# EAGLE board PCB v21_N v3 (EAGLE 9.7.0)
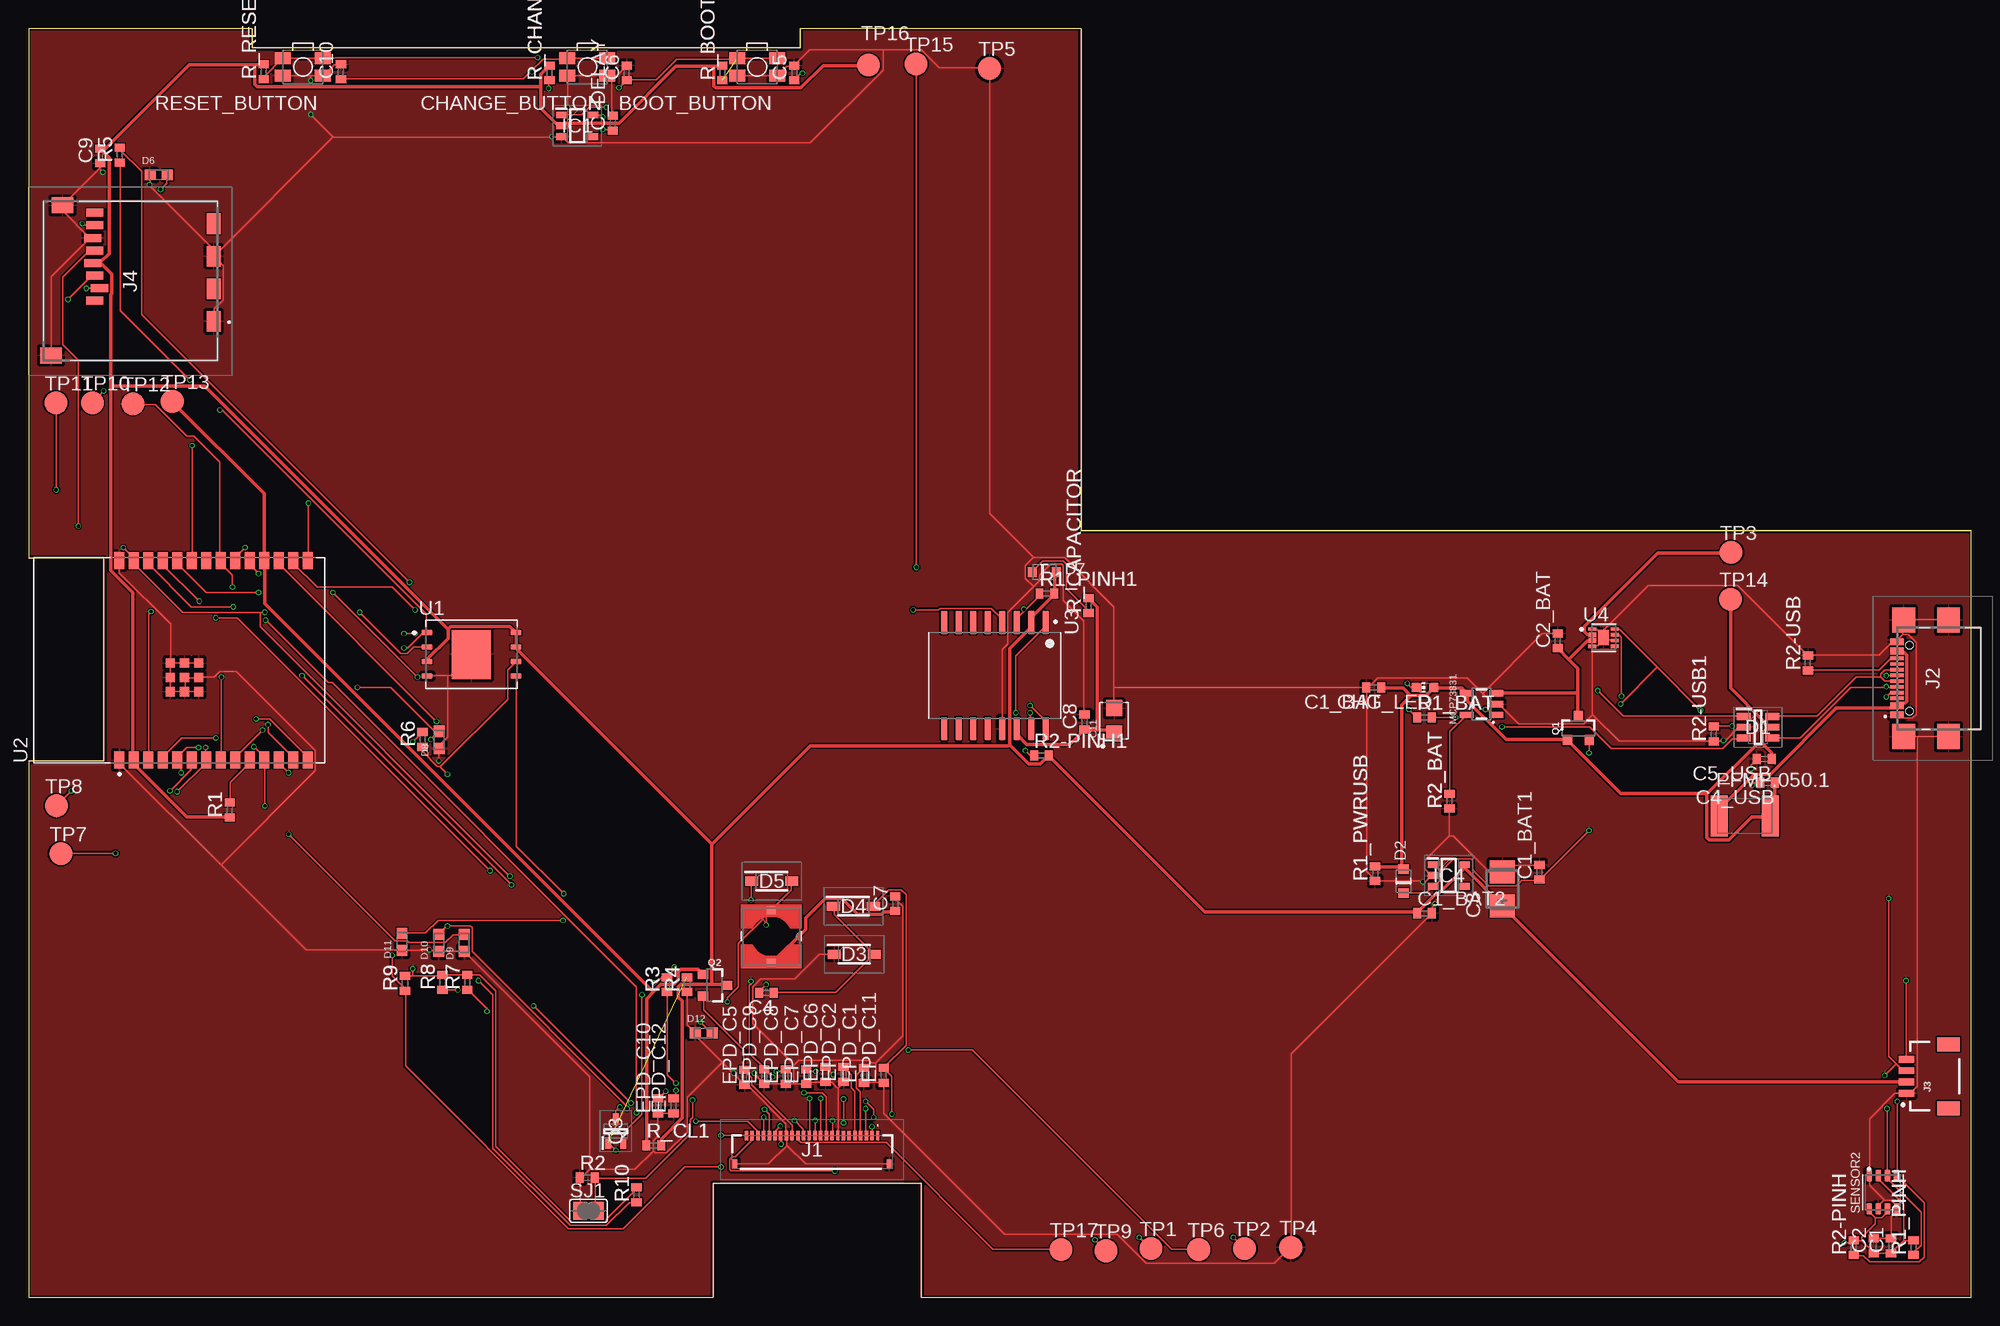
[diagram p0: board, top side]
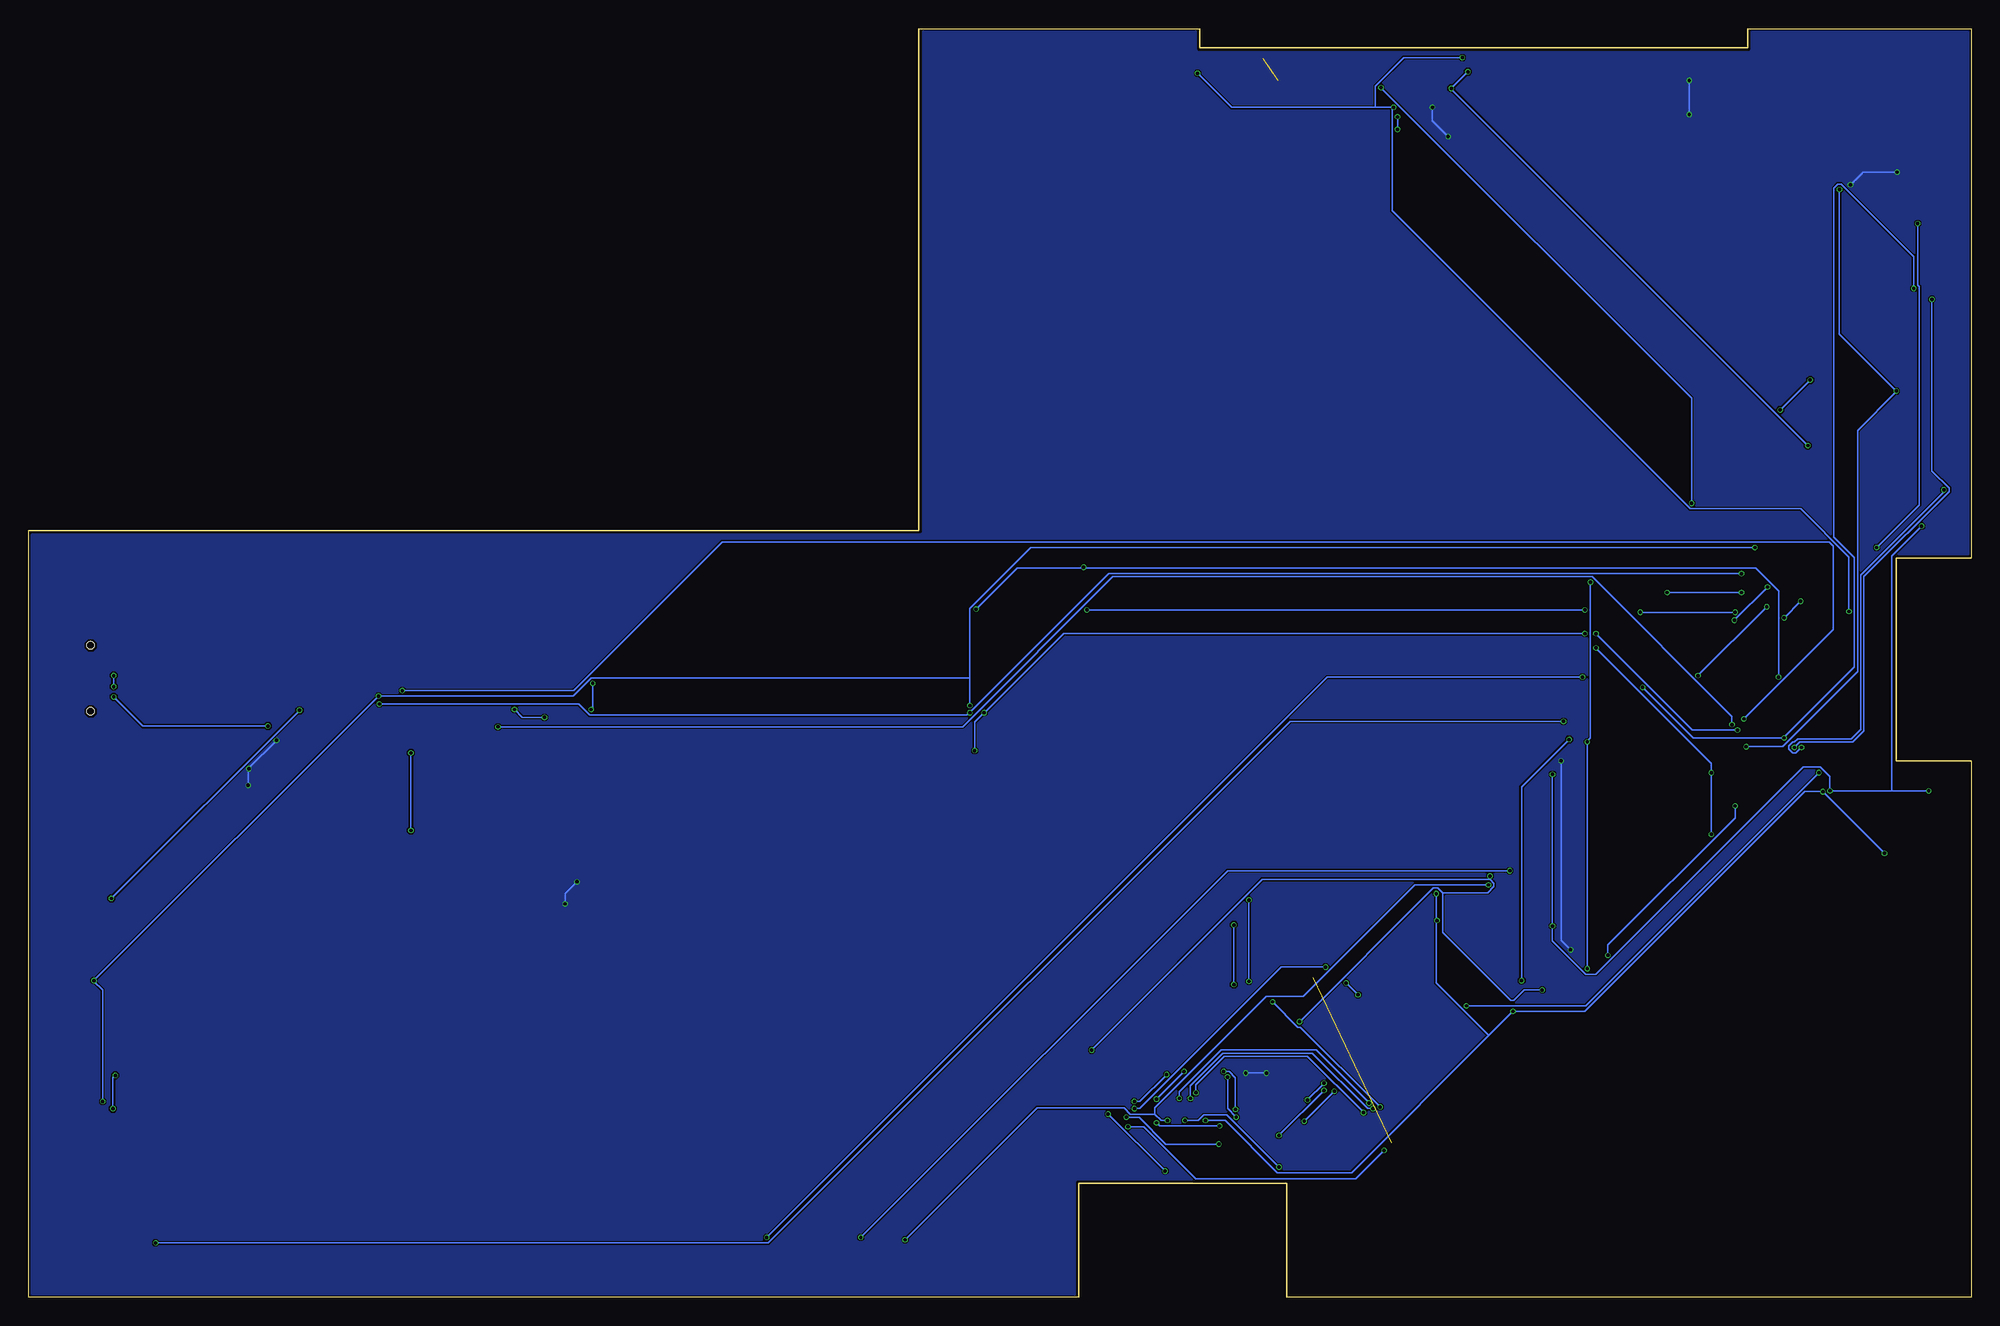
[diagram p1: board, bottom side, seen from below]

Size 170.2 x 111.2 mm. Coordinates in mm from the lower left corner, seen from the top.
Outline: 0,0 60,0 60,10 78.2,10 78.2,0 170.2,0 170.2,67.2 92.2,67.2 92.2,111.2 67.6,111.2 67.6,109.5 19.6,109.5 19.6,111.2 0,111.2 0,64.8 6.6,64.8 6.6,47 0,47 0,0
Copper layers (1*16): Top / Bottom
Stack-up Default Layer Stack: Top User Defined 0.035mm / Dielectric-1 User Defined 1.6mm / Bottom User Defined 0.035mm
Design rules: minimum copper width classes=1 0.3mm, minimum copper width classes=0 0mil, minimum copper width 0.15mm, minimum drill size 0.3mm, copper clearance wire_polygon to wire_polygon 5mil, copper clearance wire_polygon to pad_smd 5mil, copper clearance wire_polygon to via 5mil, copper clearance pad_smd to pad_smd 5mil, copper clearance pad_smd to via 5mil, copper clearance via to via 5mil, copper clearance smd to pad (same net) 5mil, copper clearance smd to via (same net) 5mil, copper clearance smd to smd (same net) 5mil, dimension clearance 0.2mm, via restrict clearance 0mil, restrict clearance 0mil, drill distance 6mil, keepout clearance 0mil
Net classes: 1 POWER: width 0.3 mm

## Footprints (pad centres in the part's own frame; a part is rotated, then mirrored left to right if it is on the bottom)
MYBUTTON = smd 1.4 x 1.05: 1 1.75,0.75; 2 -1.75,0.75; 3 -1.75,-0.75; 4 1.75,-0.75
EAGLE-LTSPICE_C0402 = smd 0.7 x 0.9: 1 -0.65,0; 2 0.65,0
ESP32_WROVER_EAGLE-LTSPICE_C0402 = smd 0.7 x 0.9: 1 -0.65,0; 2 0.65,0
RCL_CT3528 = smd 2 x 2.2: + -1.5,0; - 1.5,0
CAPCP3225X100N = smd 1.4 x 1.4: 1 -1.1,0; 2 1.1,0
ADAFRUIT_CHIP-LED0603 = smd 0.8 x 0.8: A 0,-0.75; C 0,0.75
SOT95P280X145-6N = smd 1.2 x 0.6: 1 -1.25,0.95; 2 -1.25,0; 3 -1.25,-0.95; 4 1.25,-0.95; 5 1.25,0; 6 1.25,0.95
ESP32_WROVER_AVX---SD0805S020S1R0_AVX_SD0805S020S1R0_0 = smd 0.8 x 0.9: 1 -1.05,0; 2 1.05,0
SOD3716X135N = smd 1.15 x 0.8: 1 -1.75,0; 2 1.75,0
DIOC1608X36N = smd 0.97 x 0.94: 1 -0.75,0; 2 0.75,0
SOT95P280X125-5N = smd 0.9 x 0.6: 1 -1.4,0.95; 2 -1.4,0; 3 -1.4,-0.95; 4 1.4,-0.95; 5 1.4,0.95
SOT95P280X120-5N = smd 0.9 x 0.6: 1 -1.4,0.95; 2 -1.4,0; 3 -1.4,-0.95; 4 1.4,-0.95; 5 1.4,0.95
FH34SRJ24S05SH99 = smd 0.3 x 0.8: 1 5.75,1.45; 2 5.25,1.45; 3 4.75,1.45; 4 4.25,1.45; 5 3.75,1.45; 6 3.25,1.45; 7 2.75,1.45; 8 2.25,1.45; 9 1.75,1.45; 10 1.25,1.45; 11 0.75,1.45; 12 0.25,1.45; 13 -0.25,1.45; 14 -0.75,1.45; 15 -1.25,1.45; 16 -1.75,1.45; 17 -2.25,1.45; 18 -2.75,1.45; 19 -3.25,1.45; 20 -3.75,1.45; 21 -4.25,1.45; 22 -4.75,1.45; 23 -5.25,1.45; 24 -5.75,1.45 | smd 0.4 x 0.8: MP1 6.75,-1.05; MP2 -6.75,-1.05
SAMACSYS_PARTS_USB4110GFA = smd 0.3 x 1.15: A1 -3.35,3.678; A4 -2.55,3.678; A5 -1.25,3.678; A6 -0.25,3.678; A7 0.25,3.678; A8 1.25,3.678; A9 2.55,3.678; A12 3.35,3.678; B1 3.05,3.678; B4 2.25,3.678; B5 1.75,3.678; B6 0.75,3.678; B7 -0.75,3.678; B8 -1.75,3.678; B9 -2.25,3.678; B12 -3.05,3.678 | smd 2.18 x 2: MP1 -5.11,-0.827; MP2 5.11,-0.827; MP3 -5.11,3.103; MP4 5.11,3.103 | hole 0.65: -2.89,2.603; 2.89,2.603
JST04_1MM_RA = smd 0.6 x 1.35: 1 -1.5,0; 2 -0.5,0; 3 0.5,0; 4 1.5,0 | smd 1.2 x 2: NC1 2.8,-3.675; NC2 -2.8,-3.675
112ATAARR03ATTEND = smd 1.8 x 1.2: G1 10.6,10.4; G2 4.9,10.4; S1 7.75,10.4; S2 2.05,10.4 | smd 1.4 x 1.9: G3 13.6,-3.85; G4 0.45,-2.85 | smd 0.7 x 1.5: P1 8.8,0; P2 7.7,0.4; P3 6.6,0; P4 5.5,-0.2; P5 4.4,0; P6 3.3,-0.2; P7 2.2,0; P8 1.1,0
IND_4828-WE-TPC_WRE = smd 0.635 x 0.762: 1 -2.286,0; 2 2.286,0
ESP32_WROVER_SPARKFUN-IC-POWER_SOT23-5 = smd 0.55 x 1.2: 1 -0.95,-1.3; 2 0,-1.3; 3 0.95,-1.3; 4 0.95,1.3; 5 -0.95,1.3
ESP32C6_VARISTOR_CT/CN1812 = smd 1.5 x 3.6: 1 -2.25,0; 2 2.25,0
ESP32_WROVER_SPARKFUN-DISCRETESEMI_SOT23-3 = smd 0.8 x 0.9: 1 -0.95,-1; 2 0.95,-1; 3 0,1.1
SOT65P210X110-3N = smd 1.05 x 0.5: 1 -1.05,0.65; 2 -1.05,-0.65; 3 1.05,0
ESP32_WROVER_EAGLE-LTSPICE_R0402 = smd 0.7 x 0.9: 1 -0.65,0; 2 0.65,0
ESP32_WROVER_BME680_PSON80P300X300X100-8N = smd 1.016 x 0.5: 1 1.458,1.2; 2 1.458,0.4; 3 1.458,-0.4; 4 1.458,-1.2; 5 -1.458,-1.22; 6 -1.458,-0.4; 7 -1.458,0.4; 8 -1.458,1.2
SJ = smd 1.168 x 1.6: 1 -0.762,0; 2 0.762,0
TP20R = smd 2 x 2: TP 0,0
SON127P600X800X80-9N = smd 0.94 x 0.44: 1 -3.895,1.905; 2 -3.895,0.635; 3 -3.895,-0.635; 4 -3.895,-1.905; 5 3.895,-1.905; 6 3.895,-0.635; 7 3.895,0.635; 8 3.895,1.905 | smd 3.4 x 4.3: 9 0,0
XCVR_ESP32-C6-WROOM-1-N8 = smd 1.5 x 0.9: 1 -8.75,5.26; 2 -8.75,3.99; 3 -8.75,2.72; 4 -8.75,1.45; 5 -8.75,0.18; 6 -8.75,-1.09; 7 -8.75,-2.36; 8 -8.75,-3.63; 9 -8.75,-4.9; 10 -8.75,-6.17; 11 -8.75,-7.44; 12 -8.75,-8.71; 13 -8.75,-9.98; 14 -8.75,-11.25; 15 8.75,-11.25; 16 8.75,-9.98; 17 8.75,-8.71; 18 8.75,-7.44; 19 8.75,-6.17; 20 8.75,-4.9; 21 8.75,-3.63; 22 8.75,-2.36; 23 8.75,-1.09; 24 8.75,0.18; 25 8.75,1.45; 26 8.75,2.72; 27 8.75,3.99; 28 8.75,5.26 | smd 0.8 x 0.8: 29_1 -2.755,0.79; 29_2 -1.505,0.79; 29_3 -0.255,0.79; 29_4 -2.755,-0.46; 29_5 -1.505,-0.46; 29_6 -0.255,-0.46; 29_7 -2.755,-1.71; 29_8 -1.505,-1.71; 29_9 -0.255,-1.71
SOIC127P1032X265-16N = smd 2.05 x 0.59: 1 -4.655,4.445; 2 -4.655,3.175; 3 -4.655,1.905; 4 -4.655,0.635; 5 -4.655,-0.635; 6 -4.655,-1.905; 7 -4.655,-3.175; 8 -4.655,-4.445; 9 4.655,-4.445; 10 4.655,-3.175; 11 4.655,-1.905; 12 4.655,-0.635; 13 4.655,0.635; 14 4.655,1.905; 15 4.655,3.175; 16 4.655,4.445
SON50P200X200X80-9N = smd 0.76 x 0.27: 1 -0.985,0.75; 4 -0.985,-0.75; 5 0.985,-0.75; 6 0.985,-0.25; 7 0.985,0.25; 8 0.985,0.75 | smd 0.76 x 0.422: 2 -0.985,0.25; 3 -0.985,-0.25 | smd 0.9 x 1.3: 9 0,0

## Placement (x,y rotation side)
BOOT_BUTTON  BUTTON_CUSYOMV1  [MYBUTTON]  63.83,107.83 180 top
C1  100nF  [EAGLE-LTSPICE_C0402]  163.16,4.53 90 top
C1_BAT  4.7uF  [EAGLE-LTSPICE_C0402]  117.85,53.45 180 top
C1_BAT1  4.7uF  [ESP32_WROVER_EAGLE-LTSPICE_C0402]  132.35,37.27 90 top
C1_BAT2  4.7uF  [ESP32_WROVER_EAGLE-LTSPICE_C0402]  122.29,33.67 0 top
C2  100nF  [EAGLE-LTSPICE_C0402]  161.64,4.53 90 top
C2_BAT  4.7uF  [EAGLE-LTSPICE_C0402]  133.96,57.55 90 top
C3  100uF TANT  [RCL_CT3528]  129.11,35.8 90 top
C4  4.7uF/25V  [EAGLE-LTSPICE_C0402]  64.65,26.69 180 top
C4_USB  100nF  [EAGLE-LTSPICE_C0402]  152.33,45.1 180 top
C5  1uF  [EAGLE-LTSPICE_C0402]  67.08,107.31 90 top
C5_USB  4.7uF  [EAGLE-LTSPICE_C0402]  152.05,47.18 180 top
C6  100nF  [EAGLE-LTSPICE_C0402]  52.41,107.31 90 top
C7  10uF  [EAGLE-LTSPICE_C0402]  75.92,34.51 90 top
C8  100nF  [EAGLE-LTSPICE_C0402]  92.5,50.43 90 top
C9  100nF  [EAGLE-LTSPICE_C0402]  6.28,100.03 90 top
C10  100nF  [EAGLE-LTSPICE_C0402]  27.36,107.41 90 top
C11  CPH3225A  [CAPCP3225X100N]  95.1,50.54 90 top
C_DELAY  100nF  [EAGLE-LTSPICE_C0402]  51.17,102.89 90 top
CHANGE_BUTTON  BUTTON_CUSYOMV1  [MYBUTTON]  48.96,107.83 180 top
CHG_LED  [ADAFRUIT_CHIP-LED0603]  122.34,53.45 90 top
D1  USBLC6-2SC6Y  [SOT95P280X145-6N]  151.5,49.97 0 top
D2  ESP32_WROVER_AVX---SD0805S020S1R0_AVX_SD0805S020S1R0_0_0AVX_SD0805S020S1R0_0_0  [ESP32_WROVER_AVX---SD0805S020S1R0_AVX_SD0805S020S1R0_0]  120.44,36.48 90 top
D3  MBR0530  [SOD3716X135N]  72.33,30.08 0 top
D4  MBR0530  [SOD3716X135N]  72.27,34.28 0 top
D5  MBR0530  [SOD3716X135N]  65.11,36.48 0 top
D6  PGB1010603MR  [DIOC1608X36N]  11.4,98.37 0 top
D7  ESP32_WROVER_AVX---SD0805S020S1R0_AVX_SD0805S020S1R0_0_0AVX_SD0805S020S1R0_0_0  [ESP32_WROVER_AVX---SD0805S020S1R0_AVX_SD0805S020S1R0_0]  88.99,63.58 0 top
D8  PGB1010603MR  [DIOC1608X36N]  35.98,48.87 90 top
D9  PGB1010603MR  [DIOC1608X36N]  38.16,31.07 90 top
D10  PGB1010603MR  [DIOC1608X36N]  35.94,31.07 90 top
D11  PGB1010603MR  [DIOC1608X36N]  32.72,31.17 90 top
D12  PGB1010603MR  [DIOC1608X36N]  59.15,23.18 0 top
EPD_C1  1uF/50V  [EAGLE-LTSPICE_C0402]  73.19,19.45 90 top
EPD_C2  1uF/50V  [EAGLE-LTSPICE_C0402]  71.4,19.55 90 top
EPD_C5  0.1uF/50v  [EAGLE-LTSPICE_C0402]  62.71,19.29 90 top
EPD_C6  1uF/50V  [EAGLE-LTSPICE_C0402]  69.81,19.55 90 top
EPD_C7  1uF/50V  [EAGLE-LTSPICE_C0402]  68.12,19.35 90 top
EPD_C8  1uF/50V  [EAGLE-LTSPICE_C0402]  66.33,19.35 90 top
EPD_C9  1uF/50V  [EAGLE-LTSPICE_C0402]  64.44,19.35 90 top
EPD_C10  1uF/50V  [EAGLE-LTSPICE_C0402]  55.15,16.79 90 top
EPD_C11  1uF/50V  [EAGLE-LTSPICE_C0402]  74.91,19.47 90 top
EPD_C12  1uF/50V  [EAGLE-LTSPICE_C0402]  56.49,16.79 90 top
IC1  BD5229G-TR  [SOT95P280X125-5N]  48.07,102.67 0 top
IC4  XC6220A331MR-G  [SOT95P280X120-5N]  124.41,36.97 0 top
J1  FH34SRJ-24S-0.5SH_99_  [FH34SRJ24S05SH99]  68.64,12.74 0 top
J2  SAMACSYS_PARTS_USB4110-GF-A  [SAMACSYS_PARTS_USB4110GFA]  167.36,54.26 90 top
J3  QWIIC_RIGHT_ANGLE  [JST04_1MM_RA]  164.51,19.38 90 top
J4  112A-TAAR-R03_ATTEND  [112ATAARR03ATTEND]  5.82,96.15 270 top
L1  68uH  [IND_4828-WE-TPC_WRE]  65.07,31.65 270 top
MCP73831  ESP32_WROVER_SPARKFUN-IC-POWER_MCP73831  [ESP32_WROVER_SPARKFUN-IC-POWER_SOT23-5]  127.28,51.99 90 top
PFMF.050.1  ESP32C6_VARISTORCN1812  [ESP32C6_VARISTOR_CT/CN1812]  150.34,42.2 0 top
Q1  20V/4.2A/52mΩ/1.4W  [ESP32_WROVER_SPARKFUN-DISCRETESEMI_SOT23-3]  135.76,49.86 0 top
Q2  20V/4.2A/52mΩ/1.4W  [ESP32_WROVER_SPARKFUN-DISCRETESEMI_SOT23-3]  60.08,27.36 270 top
Q3  SI1308EDL-T1-GE3  [SOT65P210X110-3N]  51.44,14.58 90 top
R1  10k  [ESP32_WROVER_EAGLE-LTSPICE_R0402]  17.62,42.71 90 top
R1_BAT  200  [ESP32_WROVER_EAGLE-LTSPICE_R0402]  122.28,50.83 0 top
R1_PINH  10K  [ESP32_WROVER_EAGLE-LTSPICE_R0402]  165.13,4.37 90 top
R1_PINH1  10K  [ESP32_WROVER_EAGLE-LTSPICE_R0402]  89.21,61.69 0 top
R1_PWRUSB  100K  [ESP32_WROVER_EAGLE-LTSPICE_R0402]  117.96,37.14 90 top
R2  2.2  [ESP32_WROVER_EAGLE-LTSPICE_R0402]  48.94,10.51 0 top
R2-PINH  10K  [ESP32_WROVER_EAGLE-LTSPICE_R0402]  159.89,4.37 90 top
R2-PINH1  10K  [ESP32_WROVER_EAGLE-LTSPICE_R0402]  88.73,47.49 0 top
R2-USB  5k1  [ESP32_WROVER_EAGLE-LTSPICE_R0402]  155.87,55.6 90 top
R2-USB1  5K1  [ESP32_WROVER_EAGLE-LTSPICE_R0402]  147.63,49.37 90 top
R2_BAT  2K  [ESP32_WROVER_EAGLE-LTSPICE_R0402]  124.47,43.49 90 top
R3  0.47  [ESP32_WROVER_EAGLE-LTSPICE_R0402]  55.94,27.41 90 top
R4  10K  [ESP32_WROVER_EAGLE-LTSPICE_R0402]  57.68,27.41 90 top
R5  10K  [ESP32_WROVER_EAGLE-LTSPICE_R0402]  8,100.11 90 top
R6  10K  [ESP32_WROVER_EAGLE-LTSPICE_R0402]  34.52,48.91 90 top
R7  10K  [ESP32_WROVER_EAGLE-LTSPICE_R0402]  38.44,27.61 90 top
R8  10K  [ESP32_WROVER_EAGLE-LTSPICE_R0402]  36.26,27.61 90 top
R9  10K  [ESP32_WROVER_EAGLE-LTSPICE_R0402]  32.98,27.51 90 top
R10  10K  [ESP32_WROVER_EAGLE-LTSPICE_R0402]  53.26,9.01 90 top
R_BOOT  10k  [ESP32_WROVER_EAGLE-LTSPICE_R0402]  60.78,107.31 90 top
R_CAPACITOR  15  [ESP32_WROVER_EAGLE-LTSPICE_R0402]  92.86,60.64 90 top
R_CHANGE  10k  [ESP32_WROVER_EAGLE-LTSPICE_R0402]  45.63,107.31 90 top
R_CL1  10K  [ESP32_WROVER_EAGLE-LTSPICE_R0402]  54.78,13.33 0 top
R_RESET  10k  [ESP32_WROVER_EAGLE-LTSPICE_R0402]  20.6,107.41 90 top
RESET_BUTTON  BUTTON_CUSYOMV1  [MYBUTTON]  24.04,107.83 180 top
SENSOR2  ESP32_WROVER_BME680_BME680  [ESP32_WROVER_BME680_PSON80P300X300X100-8N]  162.44,9.22 90 top
SJ1  [SJ]  49.06,7.59 0 top
TP1  TPTP20R  [TP20R]  98.31,4.29 0 top
TP2  TPTP20R  [TP20R]  106.53,4.29 0 top
TP3  TPTP20R  [TP20R]  149.15,65.29 0 top
TP4  TPTP20R  [TP20R]  110.57,4.39 0 top
TP5  TPTP20R  [TP20R]  84.19,107.71 0 top
TP6  TPTP20R  [TP20R]  102.51,4.19 0 top
TP7  TPTP20R  [TP20R]  2.83,38.89 0 top
TP8  TPTP20R  [TP20R]  2.45,43.09 0 top
TP9  TPTP20R  [TP20R]  94.37,4.09 0 top
TP10  TPTP20R  [TP20R]  5.59,78.41 0 top
TP11  TPTP20R  [TP20R]  2.39,78.39 0 top
TP12  TPTP20R  [TP20R]  9.14,78.31 0 top
TP13  TPTP20R  [TP20R]  12.59,78.51 0 top
TP14  TPTP20R  [TP20R]  149.09,61.19 0 top
TP15  TPTP20R  [TP20R]  77.74,108.09 0 top
TP16  TPTP20R  [TP20R]  73.59,107.99 0 top
TP17  TPTP20R  [TP20R]  90.44,4.19 0 top
U1  W25Q512JVEIQ  [SON127P600X800X80-9N]  38.79,56.36 0 top
U2  ESP32-C6-WROOM-1-N8  [XCVR_ESP32-C6-WROOM-1-N8]  13.2,55.84 90 top
U3  DS3231SN#  [SOIC127P1032X265-16N]  84.65,54.5 270 top
U4  MAX17048G+T10  [SON50P200X200X80-9N]  137.97,57.82 0 top

## Library data of the parts
BOOT_BUTTON CHANGE_BUTTON CHG_LED PFMF.050.1 RESET_BUTTON SJ1 TP1-TP17 = DeskAssistant v19 v1
C1 C1_BAT C1_BAT1 C1_BAT2 C2 C2_BAT C4 C4_USB C5 C5_USB C6-C10 C_DELAY EPD_C1 EPD_C2 EPD_C5-EPD_C12 = DeskAssistant v19 v1; SPICEMODEL: NONE; SPICEPREFIX: C
C3 = DeskAssistant v19 v1; SPICEPREFIX: C
C11 = DeskAssistant v19 v1; AVAILABILITY: Not in stock; CHECK_PRICES: https://www.snapeda.com/parts/CPH3225A/Seiko+Instruments/view-part/?ref=eda; DESCRIPTION: 11 mF (EDLC) Supercapacitor 3.3 V 1210 (3225 Metric) - -; MF: Seiko Instruments; MP: CPH3225A; PACKAGE: 1210 Seiko; PRICE: None; PURCHASE-URL: https://www.snapeda.com/api/url_track_click_mouser/?unipart_id=562593&manufacturer=Seiko Instruments&part_name=CPH3225A&search_term=None; SNAPEDA_LINK: https://www.snapeda.com/parts/CPH3225A/Seiko+Instruments/view-part/?ref=snap
D1 = DeskAssistant v19 v1; AVAILABILITY: In Stock; CHECK_PRICES: https://www.snapeda.com/parts/USBLC6-2SC6Y/STMicroelectronics/view-part/?ref=eda; DESCRIPTION: 17V Clamp 5A (8/20µs) Ipp Tvs Diode Surface Mount SOT-23-6; MF: STMicroelectronics; MP: USBLC6-2SC6Y; PACKAGE: SOT-23-6 STMicroelectronics; PRICE: None; SNAPEDA_LINK: https://www.snapeda.com/parts/USBLC6-2SC6Y/STMicroelectronics/view-part/?ref=snap
D2 D7 = DeskAssistant v19 v1; CENTROID_NOT_SPECIFIED: No; DATASHEET: http://datasheets.avx.com/schottky.pdf; DIGIKEY_DESCRIPTION: DIODE SCHOTTKY 20V 1A 0805; DIGIKEY_PART_NUMBER: 478-7800-1-ND; LEAD_FREE: yes; MF: AVX; MOUSER_PART_NUMBER: 581-SD0805S020S1R0; PACKAGE: 0805 (2012 metric); PREFIX: D; ROHS: yes; TEMPERATURE_RANGE_HIGH: +125°C; TEMPERATURE_RANGE_LOW: -55°C
D3-D5 = DeskAssistant v19 v1; AVAILABILITY: In Stock; CHECK_PRICES: https://www.snapeda.com/parts/MBR0530/Onsemi/view-part/?ref=eda; DESCRIPTION: Diode Schottky 30 V 500mA Surface Mount SOD-123; MF: ON Semiconductor; MP: MBR0530; PACKAGE: SOD-123-2 ON Semiconductor; PRICE: None; PURCHASE-URL: https://www.snapeda.com/api/url_track_click_mouser/?unipart_id=179458&manufacturer=ON Semiconductor&part_name=MBR0530&search_term=None; SNAPEDA_LINK: https://www.snapeda.com/parts/MBR0530/Onsemi/view-part/?ref=snap
D6 D8-D12 = DeskAssistant v19 v1; AVAILABILITY: In Stock; CHECK_PRICES: https://www.snapeda.com/parts/PGB1010603MR/Littelfuse/view-part/?ref=eda; DESCRIPTION: 150V (Typ) Clamp - Ipp Tvs Diode Surface Mount 0603 (1608 Metric); MF: Littelfuse Inc.; MP: PGB1010603MR; PACKAGE: 0603 Littelfuse Inc.; PRICE: None; PURCHASE-URL: https://www.snapeda.com/api/url_track_click_mouser/?unipart_id=5659453&manufacturer=Littelfuse Inc.&part_name=PGB1010603MR&search_term=None; SNAPEDA_LINK: https://www.snapeda.com/parts/PGB1010603MR/Littelfuse/view-part/?ref=snap
IC1 = DeskAssistant v19 v1; DESCRIPTION: Voltage Detector with Adjustable Delay Time: CMOS processes are utilized to develop high precision, low current consumption CMOS reset ICs that allow arbitrary setting of the delay time. The extensive lineup includes both Nch Open Drain and CMOS output types in a wide range of detection voltages (from 2.3V to 6.0V, in 0.1V steps), enabling selection of the ideal solution based on customer requirements. In addition, the entire series is of course both lead-free and RoHS-compliant.; HEIGHT: 1.25mm; MANUFACTURER_NAME: ROHM Semiconductor; MANUFACTURER_PART_NUMBER: BD5229G-TR; MOUSER_PART_NUMBER: 755-BD5229G-TR; MOUSER_PRICE-STOCK: https://www.mouser.co.uk/ProductDetail/ROHM-Semiconductor/BD5229G-TR?qs=4kLU8WoGk0vvnhrrYwdszw%3D%3D
IC4 = DeskAssistant v19 v1; DESCRIPTION: LDO Voltage Regulators; HEIGHT: 1.2mm; MANUFACTURER_NAME: Torex; MANUFACTURER_PART_NUMBER: XC6220A331MR-G; MOUSER_PART_NUMBER: 865-XC6220A331MR-G; MOUSER_PRICE-STOCK: https://www.mouser.co.uk/ProductDetail/Torex-Semiconductor/XC6220A331MR-G?qs=AsjdqWjXhJ8ZSWznL1J0gg%3D%3D
J1 = DeskAssistant v19 v1; DESCRIPTION: 24 Position FFC, FPC Connector Contacts, Top and Bottom 0.020" (0.50mm) Surface Mount, Right Angle; HEIGHT: 1.1mm; MANUFACTURER_NAME: Hirose; MANUFACTURER_PART_NUMBER: FH34SRJ-24S-0.5SH(99); MOUSER_PART_NUMBER: 798-FH34SRJ24S05SH99; MOUSER_PRICE-STOCK: https://www.mouser.co.uk/ProductDetail/Hirose-Connector/FH34SRJ-24S-0.5SH99?qs=vcbW%252B4%252BSTIpKBl5ap9J8Fw%3D%3D
J2 = DeskAssistant v19 v1; DESCRIPTION: CONN USB 2.0 TYPE-C R/A SMT; HEIGHT: 3.26mm; MANUFACTURER_NAME: GCT (GLOBAL CONNECTOR TECHNOLOGY); MANUFACTURER_PART_NUMBER: USB4110-GF-A; MOUSER_PART_NUMBER: 640-USB4110-GF-A; MOUSER_PRICE-STOCK: https://www.mouser.co.uk/ProductDetail/GCT/USB4110-GF-A?qs=KUoIvG%2F9IlYiZvIXQjyJeA%3D%3D
J3 = DeskAssistant v19 v1; PROD_ID: CONN-13694
J4 = DeskAssistant v19 v1; DESCRIPTION: Micro SD Card Socket, Push-Push Type, Top Mount, SMT, H=1.83mm, 10u; HEIGHT: 1.9mm; MANUFACTURER_NAME: ATTEND; MANUFACTURER_PART_NUMBER: 112A-TAAR-R03 ATTEND
L1 = DeskAssistant v19 v1; COPYRIGHT: Copyright (C) 2024 Ultra Librarian. All rights reserved.; MANUFACTURER_PART_NUMBER: 744043680; MFR_NAME: Wurth Electronics
MCP73831 = DeskAssistant v19 v1; PROD_ID: IC-09995
Q1 Q2 = DeskAssistant v19 v1; PROD_ID: TRAN-14388
Q3 = DeskAssistant v19 v1; AVAILABILITY: In Stock; CHECK_PRICES: https://www.snapeda.com/parts/SI1308EDL-T1-GE3/Vishay+Siliconix/view-part/?ref=eda; DESCRIPTION: Si1308EDL-T1-GE3 N-channel MOSFET Transistor, 1.5 A, 30 V, 3-Pin SC-70 | Siliconix / Vishay SI1308EDL-T1-GE3; MF: Vishay Siliconix; MP: SI1308EDL-T1-GE3; PACKAGE: SOT-323 Vishay Semiconductor; PRICE: None; PURCHASE-URL: https://www.snapeda.com/api/url_track_click_mouser/?unipart_id=274603&manufacturer=Vishay Siliconix&part_name=SI1308EDL-T1-GE3&search_term=None; SNAPEDA_LINK: https://www.snapeda.com/parts/SI1308EDL-T1-GE3/Vishay+Siliconix/view-part/?ref=snap
R1 R1_BAT R1_PINH R1_PINH1 R1_PWRUSB R2 R2-PINH R2-PINH1 R2-USB R2_BAT R3-R10 R_BOOT R_CAPACITOR R_CHANGE R_CL1 R_RESET = DeskAssistant v19 v1; SPICEMODEL: NONE; SPICEPREFIX: R
R2-USB1 = DeskAssistant v19 v1; SPICEMODEL: NONE; SPICEPREFIX: R2-USB1
SENSOR2 = DeskAssistant v19 v1; AVAILABILITY: Unavailable; DESCRIPTION: Integrated Environmental Unit; MF: Bosch Sensortec; MP: BME680; PACKAGE: LGA-8 Bosch Tools; PRICE: None
U1 = DeskAssistant v19 v1; AVAILABILITY: In Stock; CHECK_PRICES: https://www.snapeda.com/parts/W25Q512JVEIQ/Winbond+Electronics/view-part/?ref=eda; DESCRIPTION: FLASH - NOR Memory IC 512Mb (64M x 8) SPI - Quad I/O 133 MHz 8-WSON (8x6); MF: Winbond Electronics; MP: W25Q512JVEIQ; PACKAGE: Package; PRICE: None; SNAPEDA_LINK: https://www.snapeda.com/parts/W25Q512JVEIQ/Winbond+Electronics/view-part/?ref=snap
U2 = DeskAssistant v19 v1; AVAILABILITY: In Stock; CHECK_PRICES: https://www.snapeda.com/parts/ESP32-C6-WROOM-1-N8/Espressif+Systems/view-part/?ref=eda; DESCRIPTION: Multiprotocol Modules ESP32-C6 module, Wi-Fi 6 in 2.4 GHz band, Bluetooth 5, Zigbee 3.0 and Thread. ESP34-WROOM Compatible - ENGINEERING SAMPLE; MF: Espressif Systems; MP: ESP32-C6-WROOM-1-N8; PACKAGE: None; PRICE: None; SNAPEDA_LINK: https://www.snapeda.com/parts/ESP32-C6-WROOM-1-N8/Espressif+Systems/view-part/?ref=snap
U3 = DeskAssistant v19 v1; AVAILABILITY: In Stock; CHECK_PRICES: https://www.snapeda.com/parts/DS3231SN%23/Analog+Devices/view-part/?ref=eda; DESCRIPTION: Extremely Accurate I²C-Integrated RTC/TCXO/Crystal; MF: Analog Devices; MP: DS3231SN#; PACKAGE: SOIC-16 Maxim; PRICE: None; PURCHASE-URL: https://www.snapeda.com/api/url_track_click_mouser/?unipart_id=99048&manufacturer=Analog Devices&part_name=DS3231SN#&search_term=None; SNAPEDA_LINK: https://www.snapeda.com/parts/DS3231SN%23/Analog+Devices/view-part/?ref=snap
U4 = DeskAssistant v19 v1; AVAILABILITY: In Stock; CHECK_PRICES: https://www.snapeda.com/parts/MAX17048G+T10/Analog+Devices/view-part/?ref=eda; DESCRIPTION: 3µA 1-Cell/2-Cell Fuel Gauge with ModelGauge; MF: Analog Devices; MP: MAX17048G+T10; PACKAGE: TDFN-8 Maxim; PRICE: None; PURCHASE-URL: https://www.snapeda.com/api/url_track_click_mouser/?unipart_id=329239&manufacturer=Analog Devices&part_name=MAX17048G+T10&search_term=None; SNAPEDA_LINK: https://www.snapeda.com/parts/MAX17048G+T10/Analog+Devices/view-part/?ref=snap

## Nets
3V3 [POWER]: C1_BAT2.1 C3.+ C9.2 D7.2 IC1.2 IC4.5 J3.2 J4.P4 Q2.3 R1.1 R1_PINH1.2 R2-PINH1.2 R_BOOT.2 R_CHANGE.2 R_CL1.2 R_RESET.2 TP16.TP U1.3 U1.7 U1.8 U2.2 U3.2
32KHZ: R2-PINH1.1 U2.9 U3.1
DN: D1.4 J2.A7 J2.B7
DP: D1.6 J2.A6 J2.B6
EDP_3V3 [POWER]: C7.1 L1.2
EPD_3V3: EPD_C5.2 J1.15 J1.16 Q2.2 TP17.TP
EPD_3V3_C [POWER]: Q2.1 R_CL1.1 TP13.TP U2.18
EPD_BUSY: J1.9 TP9.TP U2.26
EPD_CS: D6.2 J1.12 R9.1 TP10.TP U2.11
EPD_DC: J1.11 TP11.TP U2.5
EPD_RST: J1.10 TP12.TP U2.21
FLASH_CS: D9.2 R5.1 U1.1 U2.12
GDR: J1.2 Q3.1 R4.2
GND: BOOT_BUTTON.1 BOOT_BUTTON.2 C1.2 C1_BAT1.2 C1_BAT2.2 C1_BAT.2 C2.2 C2_BAT.2 C3.- C4_USB.2 C5.2 C5_USB.2 C6.2 C7.2 C8.2 C9.1 C10.2 C11.2 C_DELAY.2 CHANGE_BUTTON.1 CHANGE_BUTTON.2 D1.2 D3.1 D6.1 D8.1 D9.1 D10.1 D11.1 D12.1 EPD_C1.1 EPD_C2.1 EPD_C5.1 EPD_C6.1 EPD_C7.1 EPD_C8.1 EPD_C9.1 EPD_C10.1 EPD_C11.1 EPD_C12.1 IC1.3 IC4.2 J1.8 J1.17 J1.MP1 J1.MP2 J2.A1 J2.A12 J2.B1 J2.B12 J2.MP1 J2.MP2 J2.MP3 J2.MP4 J3.1 J4.G1 J4.G2 J4.G3 J4.G4 J4.P6 MCP73831.2 R1_PWRUSB.1 R2-USB1.1 R2-USB.2 R2.1 R2_BAT.1 R4.1 RESET_BUTTON.1 RESET_BUTTON.2 SENSOR2.1 SENSOR2.5 SENSOR2.7 SJ1.1 TP4.TP TP5.TP U1.4 U1.9 U2.1 U2.28 U2.29_1 U2.29_2 U2.29_3 U2.29_4 U2.29_5 U2.29_6 U2.29_7 U2.29_8 U2.29_9 U3.13 U4.1 U4.4 U4.6 U4.9
GPIO8: R1.2 U2.10
I2C_PW: C1.1 C2.1 R1_PINH.2 R2-PINH.2 SENSOR2.2 SENSOR2.6 SENSOR2.8 U2.17
INT_RTC: R1_PINH1.1 TP15.TP U2.8 U3.3
IO/BOOT: BOOT_BUTTON.3 BOOT_BUTTON.4 C6.1 R_BOOT.1 U2.15
IO/CHANGE: C10.1 CHANGE_BUTTON.3 CHANGE_BUTTON.4 R_CHANGE.1 U2.23
MISO: D12.2 J4.P7 R8.1 TP6.TP U1.2 U2.27
MOSI: D11.2 J1.14 J4.P3 R7.1 TP7.TP U1.5 U2.7
N$1: C4.1 D3.2 D4.1
N$2: EPD_C12.2 J1.24
N$3: J2.A5 R2-USB1.2
N$4: J2.B5 R2-USB.1
N$6: C1_BAT1.1 D2.1 IC4.1 IC4.3 Q1.2
N$8: D7.1 R_CAPACITOR.1
N$9: EPD_C10.2 J1.22
N$10: R5.2 R6.2 R7.2 R8.2 R9.2 R10.2
N$11: EPD_C8.2 J1.20
N$12: EPD_C7.2 J1.19
N$13: EPD_C6.2 J1.18
N$15: EPD_C2.2 J1.5
N$16: C_DELAY.1 IC1.5
N$17: EPD_C1.2 J1.4
N$18: MCP73831.5 R2_BAT.2
N$20: CHG_LED.C R1_BAT.1
N$21: MCP73831.1 R1_BAT.2
PREVGH: D5.1 EPD_C9.2 J1.21
PREVGL: D4.2 EPD_C11.2 J1.23
RESE: J1.3 Q3.2 R3.2
RESE': R2.2 R3.1 SJ1.2
RESET: C5.1 IC1.1 R_RESET.1 RESET_BUTTON.3 RESET_BUTTON.4 U2.3
RTC_RST: U2.16 U3.4
RX: TP2.TP U2.24
SCK: D10.2 J1.13 J4.P5 R6.1 TP8.TP U1.6 U2.6
SCL: J3.4 R2-PINH.1 SENSOR2.4 U2.20 U3.16 U4.7
SDA: J3.3 R1_PINH.1 SENSOR2.3 U2.19 U3.15 U4.8
SRC: C4.2 D5.2 L1.1 Q3.3
SS_SD: D8.2 J4.P2 R10.1 U2.4
TX: TP1.TP U2.25
USB_D+: D1.1 U2.14
USB_D-: D1.3 U2.13
VBAT [POWER]: C2_BAT.1 MCP73831.3 Q1.3 TP3.TP U4.2 U4.3
VBUS [POWER]: C1_BAT.1 C4_USB.1 C5_USB.1 CHG_LED.A D1.5 D2.2 MCP73831.4 PFMF.050.1.2 Q1.1 R1_PWRUSB.2 TP14.TP
VRTC [POWER]: C8.1 C11.1 R_CAPACITOR.2 U3.14
VUSB [POWER]: J2.A4 J2.A9 J2.B4 J2.B9 PFMF.050.1.1

## Tracks (layer width: path | path; a pad name or v marks a point on that pad's centre or on a via)
3V3
  Top 0.3: 44.87,106.09 44.87,104.22 46.4,102.7 46.6,102.7 IC1.2 46.81,102.7 47.02,102.91 51.73,102.91 56.72,107.89 60.04,107.89 | 44.87,106.09 44.87,107.2 45.57,107.89 R_CHANGE.2 | 60.04,107.89 60.73,107.89 R_BOOT.2 | 60.04,107.89 60.04,106.16 60.18,106.02 67.66,106.02 69.6,107.96 73.54,107.96 TP16.TP | R1.1 17.59,42.11 13.85,42.11 9.21,46.75 9.21,47.02 U2.2 9.14,47.23 9.14,61.77 7.2,63.71 7.2,79.85 | 6.3,90.72 7.06,91.48 7.06,99.86 6.3,100.62 C9.2 6.58,100.55 14.06,108.03 19.8,108.03 | 6.3,90.72 5.68,90.72 J4.P4 | 19.8,108.03 20.57,108.03 R_RESET.2 | 7.2,79.85 7.2,87.88 7.27,87.95 7.27,89.68 6.37,90.58 6.3,90.72 | 44.87,106.09 20.01,106.09 19.8,106.3 19.8,108.03 | 125.76,37.6 123.54,35.39 123.33,35.39 121.67,33.73 C1_BAT2.1 121.53,33.8 103.04,33.8 89.47,47.37 R2-PINH1.2 89.33,47.44 88.64,46.75 87.6,46.75 85.94,48.41 | 125.76,37.6 125.76,37.88 IC4.5 | J3.2 164.47,18.91 144.53,18.91 129.15,34.28 C3.+ 129.01,34.42 125.9,37.53 125.76,37.6 | D7.2 90.03,63.57 89.89,63.43 89.89,61.7 R1_PINH1.2 89.82,61.56 87.88,59.62 87.88,59.28 U3.2 87.81,59.14 87.81,58.72 85.94,56.86 85.94,48.41 | 36.77,58.59 36.77,57.76 34.9,55.89 34.9,55.75 U1.3 | 36.77,58.59 36.98,58.79 42.17,58.79 42.66,58.31 U1.8 42.73,58.17 42.73,57.06 U1.7 42.73,56.86 59.83,39.75 | 59.83,27.42 61.15,27.42 Q2.3 | 59.83,27.42 57.13,27.42 56.92,27.22 56.92,26.32 57.27,25.97 57.27,15.72 55.47,13.92 55.47,13.37 R_CL1.2 | 59.83,27.42 59.83,39.75 | 85.94,48.41 85.8,48.34 68.49,48.34 59.97,39.82 59.83,39.75 | 7.2,79.85 15.44,79.85 36.63,58.66 36.77,58.59
32KHZ  (via drill 0.3)
  Top 0.15: v87.32,47.92 87.74,47.51 88.02,47.51 R2-PINH1.1 | v86.49,51.25 86.49,56.23 89.06,58.79 89.06,59.14 U3.1 | v20.5,49.72 18.14,47.37 18.14,47.09 U2.9 | v33.86,58.17 v32.89,58.17
  Bottom 0.15: v87.32,47.92 87.32,50.41 v86.49,51.25 86.42,51.25 79.5,58.17 v33.86,58.17 | v20.5,49.72 24.45,49.72 v32.89,58.17
DN  (via drill 0.3)
  Top 0.15: 162.74,53.46 159.62,53.46 155.19,49.03 152.77,49.03 D1.4 | 162.74,53.46 163.64,53.46 J2.B7 | v162.74,54.5 163.64,54.5 J2.A7 | v162.74,53.53 162.74,53.46
  Bottom 0.15: v162.74,53.53 v162.74,54.5
DP
  Top 0.15: 162.25,54.36 162.6,54.02 163.64,54.02 J2.A6 | 162.25,54.36 162.25,54.64 162.6,54.99 163.64,54.99 J2.B6 | 162.25,54.36 160.11,54.36 156.71,50.97 152.77,50.97 D1.6
EDP_3V3
  Top 0.3: C7.1 75.9,33.8 74.93,33.8 74.72,33.59 72.64,33.59 71.26,34.97 69.8,34.97 68.07,33.24 68.07,32.27 65.23,29.43 65.09,29.43 L1.2
EPD_3V3
  Top 0.15: Q2.2 59.14,26.39 59.14,25.21 62.67,21.68 62.67,19.95 EPD_C5.2 62.74,19.88 63.36,19.25 63.36,18.63 66.89,15.1 66.89,14.27 J1.16 J1.15 67.45,14.13 67.45,13.78 67.66,13.57 75.14,13.57 84.48,4.23 90.37,4.23 TP17.TP
EPD_3V3_C
  Top 0.3: 54.74,26.77 55.4,27.42 56.51,27.42 56.92,27.84 56.92,28.53 57.13,28.74 58.66,28.74 59.07,28.32 Q2.1 | 54.74,26.77 54.15,26.18 54.15,13.37 R_CL1.1 | TP13.TP 12.6,78.46 20.64,70.43 20.64,64.61 U2.18 20.71,64.47 20.71,60.8 54.74,26.77
EPD_BUSY  (via drill 0.3)
  Top 0.15: v70.43,15.51 70.43,14.2 J1.9 | v93.42,5.06 94.32,4.16 TP9.TP | v17.94,60.53 14.27,60.53 10.53,64.27 10.53,64.54 U2.26 | v42.31,36.15 v23.96,54.5
  Bottom 0.15: v70.43,15.51 70.98,15.51 71.53,16.07 | 71.53,16.07 73.68,16.07 74.24,16.62 81.85,16.62 v93.42,5.06 | v23.96,54.5 v17.94,60.53 | v42.31,36.15 48.75,36.15 58.52,26.39 61.77,26.39 71.53,16.62 71.53,16.07
EPD_CS  (via drill 0.3)
  Top 0.15: v68.9,15.51 68.9,14.2 J1.12 | v60.66,11.43 57.48,11.43 52.08,6.03 47.3,6.03 33.03,20.29 33.03,26.8 R9.1 32.96,26.87 32.96,27.08 31.86,28.19 v31.86,29.99 | v11.56,97.09 12.12,97.64 12.12,98.34 D6.2 | v6.58,79.43 5.61,78.46 TP10.TP | v19.74,48.27 20.64,47.37 U2.11 20.71,47.02 v20.71,43.08
  Bottom 0.15: v68.9,15.51 67.73,15.51 67.24,16 65.23,16 v60.66,11.43 | v11.56,97.09 11.56,84.42 v6.58,79.43 6.58,79.36 9.97,75.97 9.97,54.85 16.55,48.27 v19.74,48.27 | v31.86,29.99 31.86,30.89 20.71,42.04 v20.71,43.08
EPD_DC  (via drill 0.3)
  Top 0.15: v69.39,17.45 J1.11 | v44.25,25.55 v52.77,17.04 | v13.37,45.98 13.37,46.75 13.09,47.02 U2.5 13.02,47.16 13.02,47.37 13.85,48.2 v14.89,48.2 | v2.42,70.78 2.42,78.32 TP11.TP
  Bottom 0.15: v69.39,17.45 69.39,18.01 65.72,21.68 57.41,21.68 v52.77,17.04 | v44.25,25.55 33.79,25.55 v13.37,45.98 | v2.42,70.78 2.42,70.57 9.7,63.3 9.7,49.79 10.53,48.96 15.23,48.96 15.51,48.68 15.65,48.68 16,48.34 16,48.06 15.65,47.72 15.37,47.72 v14.89,48.2
EPD_RST  (via drill 0.3)
  Top 0.15: v67.93,17.94 69.53,17.94 69.87,17.59 69.87,14.2 J1.10 | v53.25,16.21 53.25,27.22 26.59,53.88 26.25,53.88 v20.77,59.35 | v17.87,62.26 17.87,63.3 16.9,64.27 16.9,64.54 U2.21 16.76,64.61 16.76,73.2 14.47,75.48 13.85,75.48 11.08,78.25 9.14,78.25 TP12.TP
  Bottom 0.15: v67.93,17.94 67.93,18.63 65.44,21.12 58.17,21.12 v53.25,16.21 | v17.87,62.26 v20.77,59.35
FLASH_CS  (via drill 0.3)
  Top 0.15: v22.78,40.58 32.13,31.23 33.17,31.23 33.31,31.09 36.49,31.09 37.19,31.79 38.16,31.79 D9.2 | v22.78,45.98 21.95,46.81 21.95,47.02 U2.12 | v14.13,80.4 8.03,86.49 8.03,99.44 R5.1 | v16.76,77.77 16.97,77.77 34.83,59.9 34.83,58.31 U1.1 34.76,58.45 33.24,56.92 v32.89,56.92
  Bottom 0.15: v22.78,40.58 v22.78,45.98 22.78,46.81 v32.89,56.92 | v16.76,77.77 v14.13,80.4
GDR  (via drill 0.3)  (1 unrouted)
  Top 0.15: v73.89,14.96 J1.2 | v51.45,12.88 50.83,13.5 Q3.1
  Bottom 0.15: v73.89,14.96 72.5,14.96 67.93,10.39 53.95,10.39 v51.45,12.88
GND  (via drill 0.3)
  Top 0.15: 74.24,18.84 74.86,18.84 EPD_C11.1 74.93,18.77 74.93,16.14 85.52,5.54 95.36,5.54 97.92,2.98 109.14,2.98 110.52,4.36 TP4.TP 110.59,4.43 110.59,21.33 122.92,33.66 C1_BAT2.2 122.99,33.73 122.99,34.28 v123.2,34.49 | 74.24,18.84 73.2,18.84 EPD_C1.1 | 74.24,20.57 76.59,22.92 76.59,34.28 75.97,34.9 75.97,35.11 C7.2 | 74.24,18.84 74.24,20.57 | 70.91,18.35 70.91,14.2 J1.8 | 70.91,18.35 71.4,18.84 EPD_C2.1 | 70.91,18.35 70.84,18.35 70.36,18.84 69.87,18.84 EPD_C6.1 69.8,18.84 68.21,18.84 68.14,18.77 EPD_C7.1 68.07,18.7 67.03,18.7 | 67.03,18.7 EPD_C8.1 66.27,18.7 64.47,18.7 EPD_C9.1 64.4,18.77 63.57,19.6 v63.57,19.67 | 67.03,20.43 63.43,24.03 63.43,27.22 64.13,27.91 67.1,27.91 69.25,30.06 70.57,30.06 D3.1 | 67.03,18.7 67.03,20.43 | 74.24,20.57 73.82,20.57 73.61,20.78 67.45,20.78 67.1,20.43 67.03,20.43 | EPD_C12.1 56.44,16.14 55.19,16.14 EPD_C10.1 55.12,16.07 55.12,14.13 54.71,13.71 54.71,12.81 | SJ1.1 48.34,7.62 48.34,10.46 R2.1 48.41,10.46 49.17,11.22 | 54.71,12.81 53.12,11.22 49.17,11.22 | R4.1 57.69,26.73 57.69,23.89 58.38,23.2 D12.1 58.45,23.13 58.45,22.92 60.77,20.6 | 66.41,13.3 64.82,11.71 61.91,11.71 J1.MP2 | 66.41,13.3 66.41,14.13 J1.17 66.34,14.2 66.34,15.24 62.95,18.63 62.74,18.63 EPD_C5.1 62.67,18.7 61.74,19.63 | J1.MP1 75.34,11.71 68.07,11.71 66.48,13.3 66.41,13.3 | 61.74,19.63 60.77,20.6 | 60.77,20.6 57.69,17.52 57.69,14.47 55.88,12.67 54.91,12.67 54.78,12.81 54.71,12.81 | v61.77,19.67 61.74,19.63 | U2.29_4 13.71,53.12 13.71,54.29 U2.29_5 13.78,54.29 14.89,54.29 U2.29_8 14.96,54.36 16.27,54.36 16.76,54.85 18.21,54.85 25.14,47.92 25.14,46.19 16.86,37.92
  Top 0.15: U2.29_7 14.89,53.12 13.78,53.12 U2.29_4 | U2.29_4 13.64,53.12 12.46,53.12 U2.29_1 12.4,53.12 12.4,54.29 U2.29_2 12.4,54.36 12.4,55.54 U2.29_3 | U2.29_3 12.46,55.61 13.64,55.61 U2.29_6 13.71,55.61 14.89,55.61 U2.29_9 | U2.28 7.96,64.54 7.96,63.5 12.46,59 12.46,55.68 U2.29_3 | 36.7,54.5 36.98,54.5 38.78,56.3 U1.9 | 36.7,54.5 34.9,54.5 U1.4 | 36.7,54.5 36.7,49.1 36.01,48.41 36.01,48.13 D8.1 35.94,48.06 v35.94,47.02 | 35.11,30.4 35.94,30.4 D10.1 35.94,30.33 38.16,30.33 D9.1 38.23,30.26 49.17,19.32 49.17,11.22 | 35.11,30.4 32.76,30.4 D11.1 32.69,30.47 24.31,30.47 16.86,37.92 | 16.86,37.92 7.96,46.81 7.96,47.02 U2.1 | v35.11,30.47 35.11,30.4 | BOOT_BUTTON.1 62.12,107.06 65.51,107.06 BOOT_BUTTON.2 65.65,107.13 66.41,107.89 67.03,107.89 C5.2 67.1,108.03 68.42,109.35 74.86,109.35 | 74.86,109.35 78.18,109.35 79.78,107.75 84.14,107.75 TP5.TP 84.21,107.69 84.21,68.7 88.02,64.89 88.02,64.82 | 6.23,98.96 6.23,99.38 C9.1 | 6.23,98.96 J4.G4 2.98,95.64 2.98,95.22 5.33,92.87 5.61,92.87 J4.P6 5.33,92.8 2.01,89.47 2.01,82.62 J4.G3 | C_DELAY.2 51.11,103.6 51.11,106.72 50.76,107.06 CHANGE_BUTTON.2 | C6.2 52.35,107.89 51.18,106.72 CHANGE_BUTTON.2 | CHANGE_BUTTON.2 50.69,107.06 47.23,107.06 CHANGE_BUTTON.1 47.23,106.99 v47.23,104.29 | C10.2 27.35,108.03 26.8,108.03 25.83,107.06 RESET_BUTTON.2 25.76,107.06 24.72,107.06 | 24.72,107.06 22.3,107.06 RESET_BUTTON.1 | 26.66,101.66 45.84,101.66 | 45.84,101.66 46.6,101.66 IC1.3 46.74,101.73 47.3,101.17 68.49,101.17 74.86,107.55 74.86,109.35 | 26.66,101.66 16.27,91.27 J4.G2 | 10.66,97.51 10.66,97.37 16.48,91.55 J4.G2 | 10.66,97.51 10.66,98.34 D6.1
  Top 0.15: J4.G1 16.27,85.59 16.27,86.63 17.04,87.39 17.04,90.44 16.27,91.2 J4.G2 | v24.72,106.65 24.72,107.06 | v24.72,103.67 26.66,101.73 26.66,101.66 | v45.84,101.73 45.84,101.66 | v6.51,98.61 6.23,98.89 6.23,98.96 | v10.6,97.51 10.66,97.51 | C2.2 161.7,5.2 163.15,5.2 C1.2 163.15,5.26 163.15,7.06 163.64,7.55 163.64,7.76 SENSOR2.5 163.64,7.83 163.64,8.03 163.15,8.52 162.53,8.52 | 162.53,8.52 162.04,8.03 162.04,7.83 SENSOR2.7 | 162.53,8.52 162.53,8.59 161.28,9.83 161.28,10.67 SENSOR2.1 161.28,10.73 161.28,15.65 163.5,17.87 164.47,17.87 J3.1 164.54,17.94 164.88,17.94 165.44,18.49 165.44,49.17 | J2.A1 163.71,50.97 163.71,51.18 J2.B12 | J2.A1 163.71,50.9 163.71,49.65 164.19,49.17 J2.MP3 164.26,49.17 165.44,49.17 | 165.44,49.17 168.14,49.17 J2.MP1 | 164.19,58.1 164.19,59.35 J2.MP4 164.26,59.42 168.14,59.42 J2.MP2 | 164.19,58.1 163.71,57.62 J2.A12 163.71,57.55 163.71,57.34 J2.B1 163.64,57.27 163.08,57.27 162.11,56.3 155.88,56.3 R2-USB.2 155.81,56.3 149.72,62.4 141.89,62.4 137.74,58.24 U4.9 | 164.19,58.1 164.68,58.1 165.37,57.41 165.37,51.11 165.02,50.76 163.78,50.76 J2.A1 | C1_BAT1.2 132.34,37.88 129.71,37.88 129.15,37.33 C3.- 129.08,37.33 127.91,37.33 124.79,40.44 124.44,40.44 | 122.16,36.5 122.43,36.5 122.85,36.91 122.99,36.91 IC4.2 122.85,36.98 122.3,37.53 122.3,38.3 124.44,40.44 | 122.16,36.5 118,36.5 R1_PWRUSB.1 118,36.56 117.24,37.33 117.24,53.39 C1_BAT.2 | v122.16,36.43 122.16,36.5 | 124.44,40.44 124.44,42.8 R2_BAT.1 | 88.05,62.29 85.8,60.04 85.8,57.27 85.32,56.79 85.32,49.86 U3.13 | 88.05,62.29 88.57,62.81 88.57,63.3 89.54,64.27 90.51,64.27 90.65,64.13 90.65,61.08 92.45,59.28 92.45,51.11 C8.2
  Top 0.15: 95.08,53.46 95.08,60.53 90.79,64.82 88.02,64.82 | 95.08,53.46 95.08,51.66 C11.2 | 88.02,64.82 87.32,64.13 87.32,63.02 88.05,62.29 | v150.97,44.88 151.17,45.08 151.66,45.08 C4_USB.2 | v150.9,46.33 150.9,46.68 C5_USB.2 | 148.47,48.75 148.61,48.75 149.79,49.93 150.2,49.93 D1.2 | 148.47,48.75 147.64,48.75 R2-USB1.1 147.57,48.75 139.33,48.75 137.05,51.04 136.98,51.04 | v148.47,48.82 148.47,48.75 | U4.9 137.95,57.76 137.95,57.62 137.46,57.13 137.05,57.13 U4.4 136.98,51.04 | U4.1 137.05,58.52 137.39,58.52 137.95,57.96 137.95,57.83 U4.9 | U4.6 138.92,57.62 138.01,57.62 U4.9 | 127.39,52.94 128.32,52.01 128.53,52.01 MCP73831.2 128.6,51.94 128.87,51.94 130.54,50.28 136.22,50.28 136.98,51.04 | 127.39,52.94 126.03,54.29 118.21,54.29 117.38,53.46 117.24,53.46 C1_BAT.2 | 127.39,52.94 132.61,58.17 133.93,58.17 C2_BAT.2 | 95.08,53.46 117.17,53.46 C1_BAT.2
  Bottom 0.15: v61.77,19.67 v63.57,19.67 | v35.94,47.02 35.94,31.3 v35.11,30.47 | v24.72,103.67 v24.72,106.65 | v47.23,104.29 47.23,103.12 v45.84,101.73 | v6.51,98.61 9.49,98.61 v10.6,97.51 | v123.2,34.49 123.2,35.39 v122.16,36.43 | v150.97,44.88 150.97,46.26 v150.9,46.33 150.9,46.4 v148.47,48.82
  pour Top: -0.3,111.9 92.8,111.9 92.8,68.4 174.6,68.4 174.7,68.3 174.7,-0.6 77.7,-0.6 77.6,-0.5 77.6,9.4 60.6,9.4 60.6,-0.5 -1.2,-0.5 -1.3,-0.4 -1.3,47.3 6.1,47.3 6.2,47.4 6.2,64.4 -0.3,64.4
  pour Bottom: -0.3,111.9 92.8,111.9 92.8,68.4 174.6,68.4 174.7,68.3 174.7,-0.6 77.7,-0.6 77.7,9.4 60.6,9.4 60.6,-0.5 -1.3,-0.5 -1.3,47.3 -1.2,47.4 6.1,47.4 6.1,64.4 -0.3,64.4
GPIO8
  Top 0.15: R1.2 17.66,43.42 17.66,45.15 19.32,46.81 19.32,47.02 U2.10
I2C_PW  (via drill 0.3)
  Top 0.15: 161.77,7 161.28,7.48 161.28,7.76 SENSOR2.8 | 161.77,7 162.32,7 162.81,7.48 162.81,7.76 SENSOR2.6 | 160.59,4.99 159.9,4.99 R2-PINH.2 159.83,4.99 159.62,4.78 v159.07,4.78 | 160.59,4.99 161.63,3.95 C2.1 161.7,3.88 C1.1 163.22,3.95 164.26,4.99 | 164.26,4.99 165.09,4.99 R1_PINH.2 | 164.26,4.99 164.26,8.17 162.04,10.39 162.04,10.67 SENSOR2.2 | v35.73,50.48 21.95,64.27 21.95,64.54 U2.17 | 161.77,7 161.77,6.44 160.59,5.26 160.59,4.99
  Bottom 0.15: v35.73,50.48 59.69,50.48 105.4,4.78 v159.07,4.78
INT_RTC  (via drill 0.3)
  Top 0.15: 87.29,60.21 86.56,59.49 86.56,59.21 U3.3 | 87.29,60.21 88.5,61.43 88.5,61.63 R1_PINH1.1 | v16.9,54.36 16.9,47.09 U2.8 | 87.29,60.21 v87.19,60.32 | v77.77,63.99 77.77,108.03 TP15.TP
  Bottom 0.15: v16.9,54.36 16.9,61.91 18.91,63.92 77.77,63.92 | 77.77,63.92 83.58,63.92 v87.19,60.32 | v77.77,63.99 77.77,63.92
IO/BOOT  (via drill 0.3)  (1 unrouted)
  Top 0.15: BOOT_BUTTON.3 62.12,108.59 BOOT_BUTTON.4 62.05,108.52 56.78,108.52 54.98,106.72 52.42,106.72 C6.1 52.35,106.65 v51.73,106.02 | v24.52,69.6 24.52,64.61 U2.15
  Bottom 0.15: v24.52,69.6 24.52,78.81 v51.73,106.02
IO/CHANGE  (via drill 0.3)
  Top 0.15: 44.01,107.44 45.08,108.52 47.16,108.52 CHANGE_BUTTON.4 47.23,108.59 50.69,108.59 CHANGE_BUTTON.3 | 44.01,107.44 43.35,106.78 27.42,106.78 C10.1 | v45.57,105.95 45.57,106.65 R_CHANGE.1 | v44.11,107.41 44.04,107.41 44.01,107.44 | v14.34,74.65 14.34,64.61 U2.23
  Bottom 0.15: v44.11,107.41 v45.57,105.95 45.57,105.88 v14.34,74.65
MISO  (via drill 0.3)
  Top 0.15: v29.02,60.04 32.62,56.44 33.17,56.44 33.73,56.99 34.83,56.99 U1.2 | 20.29,60.04 13.5,60.04 9.21,64.33 9.21,64.54 U2.27 9.14,64.61 9.14,64.89 v8.31,65.72 | 20.29,60.04 v20.71,60.04 | v4.71,94.11 4.85,93.97 5.75,93.97 J4.P7 | v37.6,26.94 36.29,26.94 R8.1 | v58.86,24.17 59.83,23.2 D12.2 | v77.08,21.68 82.68,21.68 100.14,4.23 102.49,4.23 TP6.TP | 20.29,60.04 20.29,58.79 v42.17,36.91
  Bottom 0.15: v20.71,60.04 v29.02,60.04 | v4.71,94.11 4.71,88.71 4.57,88.57 4.57,69.46 v8.31,65.72 | v37.6,26.94 39.2,26.94 40.1,26.04 40.37,26.04 46.33,31.99 46.33,35.46 | 46.33,35.46 46.74,35.87 47.16,35.87 v58.86,24.17 | v77.08,21.68 62.12,36.63 42.17,36.63 | 42.17,36.63 41.83,36.29 41.83,36.01 42.38,35.46 46.33,35.46 | 42.17,36.63 v42.17,36.91
MOSI  (via drill 0.3)
  Top 0.15: v13.02,44.32 15.51,46.81 15.51,47.02 U2.7 15.51,47.09 v15.51,48.2 | v7.62,38.92 2.84,38.92 TP7.TP | v3.46,87.46 5.54,89.54 5.75,89.54 J4.P3 | v67.1,15.51 67.86,14.75 67.86,14.2 J1.14 | v40.16,25.07 40.16,25.28 38.5,26.94 R7.1 | v46.88,35.39 42.73,39.54 42.73,54.43 U1.5 | v46.81,33.03 35.87,33.03 34.76,31.93 32.76,31.93 D11.2
  Bottom 0.15: v7.62,38.92 v13.02,44.32 14.61,44.32 33.86,25.07 v40.16,25.07 42.28,22.96 | v3.46,87.46 3.46,72.44 1.94,70.91 1.94,70.64 9.42,63.16 9.42,49.65 10.39,48.68 15.03,48.68 v15.51,48.2 | v67.1,15.51 65.37,15.51 60.8,10.94 54.29,10.94 42.28,22.96 | 46.88,33.03 46.88,27.56 42.28,22.96 | 46.88,33.03 v46.88,35.39 | v46.81,33.03 46.88,33.03
N$1
  Top 0.15: C4.1 65.3,26.73 70.7,26.73 74.03,30.06 D3.2 74.03,30.12 70.57,33.59 70.57,34.28 D4.1
N$2  (via drill 0.3)
  Top 0.15: v60.66,14.2 62.88,14.2 J1.24 | v56.72,18.14 56.72,17.66 56.51,17.45 EPD_C12.2
  Bottom 0.15: v56.72,18.14 v60.66,14.2
N$3  (via drill 0.3)
  Top 0.15: v149.23,50.07 147.64,50.07 R2-USB1.2 | v162.74,52.63 163.08,52.98 163.64,52.98 J2.A5
  Bottom 0.15: v149.23,50.07 160.18,50.07 v162.74,52.63
N$4
  Top 0.15: R2-USB.1 155.88,54.99 162.11,54.99 163.08,55.95 163.64,55.95 J2.B5
N$6  (via drill 0.3)
  Top 0.15: D2.1 120.5,35.46 122.43,35.46 122.99,36.01 IC4.3 123.06,36.08 123.2,36.08 123.68,36.56 123.68,37.4 | 123.68,37.4 123.2,37.88 123.06,37.88 IC4.1 | 123.68,37.4 123.75,37.4 124.79,38.44 126.38,38.44 126.52,38.3 126.52,37.47 127.91,36.08 130.33,36.08 130.81,36.56 132.34,36.56 C1_BAT1.1 132.41,36.63 v136.7,40.93 | v136.7,47.72 136.7,48.82 Q1.2
  Bottom 0.15: v136.7,40.93 v136.7,47.72
N$8
  Top 0.15: R_CAPACITOR.1 92.8,60.04 92.8,60.25 90.92,62.12 90.92,64.27 90.65,64.54 88.85,64.54 87.95,63.64 D7.1
N$9  (via drill 0.3)
  Top 0.15: v58.45,15.44 63.02,15.44 63.85,14.61 63.85,14.2 J1.22 | v55.82,18.07 55.19,17.45 EPD_C10.2
  Bottom 0.15: v55.82,18.07 v58.45,15.44
N$10  (via drill 0.3)
  Top 0.15: 33.66,28.19 36.15,28.19 36.22,28.25 R8.2 36.29,28.25 R7.2 38.5,28.25 39.54,28.25 40.93,26.87 40.93,13.23 47.58,6.58 50.48,6.58 50.62,6.72 50.62,6.86 53.25,9.49 53.25,9.63 R10.2 | 33.66,28.19 33.03,28.19 R9.2 | v33.66,48.68 34.49,49.52 R6.2 | 33.66,28.19 v33.66,28.81 | v33.38,62.67 9.9,86.15 9.9,98.68 8.03,100.55 8.03,100.76 R5.2
  Bottom 0.15: v33.66,28.81 v33.66,48.68 33.66,48.75 33.38,49.03 v33.38,62.67
N$11  (via drill 0.3)
  Top 0.15: v64.47,16.48 64.89,16.07 J1.20 | v65.51,19.81 66.13,19.81 66.27,19.95 EPD_C8.2
  Bottom 0.15: v64.47,16.48 64.47,19.25 65.03,19.81 v65.51,19.81
N$12  (via drill 0.3)
  Top 0.15: v65.86,15.03 65.44,14.61 65.44,14.2 J1.19 | v71.4,17.38 v71.4,15.31 | v68.97,19.81 68.28,19.81 68.14,19.95 EPD_C7.2
  Bottom 0.15: v65.86,15.03 71.12,15.03 v71.4,15.31 | v68.97,19.81 v71.4,17.38
N$13  (via drill 0.3)
  Top 0.15: v65.93,13.44 65.93,14.13 J1.18 | v74.03,15.79 74.03,16.48 v73.34,17.17 | v70.5,19.53 69.87,20.15 EPD_C6.2
  Bottom 0.15: v65.93,13.44 70.57,13.44 72.92,15.79 v74.03,15.79 | v73.34,17.17 72.85,17.17 v70.5,19.53
N$15
  Top 0.15: J1.5 72.37,14.2 72.37,18.07 72.09,18.35 72.09,19.53 71.47,20.15 EPD_C2.2
N$16  (via drill 0.3)
  Top 0.15: v50.28,103.46 50.14,103.6 49.51,103.6 IC1.5 | v50.28,102.35 51.04,102.35 51.11,102.28 C_DELAY.1
  Bottom 0.15: v50.28,102.35 v50.28,103.46
N$17
  Top 0.15: J1.4 72.85,14.2 72.85,18.01 72.5,18.35 72.5,19.46 73.13,20.08 EPD_C1.2
N$18
  Top 0.15: R2_BAT.2 124.51,44.18 124.51,49.58 125.97,51.04 MCP73831.5
N$20  (via drill 0.3)
  Top 0.15: v120.77,53.81 121.12,53.46 121.53,53.46 CHG_LED.C | v120.91,51.52 121.6,50.83 R1_BAT.1
  Bottom 0.15: v120.77,53.81 120.77,51.66 v120.91,51.52
N$21  (via drill 0.3)
  Top 0.15: v125,50.83 122.99,50.83 R1_BAT.2 | v127.63,51.52 127.83,51.52 128.25,51.11 128.53,51.11 MCP73831.1
  Bottom 0.15: v125,50.83 126.94,50.83 v127.63,51.52
PREVGH  (via drill 0.3)
  Top 0.15: v64.4,15.79 64.4,14.2 J1.21 | v65.16,19.32 64.47,20.01 EPD_C9.2 64.47,20.08 63.16,21.4 63.16,27.36 63.29,27.49 v63.29,27.7 | v63.29,34.83 63.29,36.43 D5.1
  Bottom 0.15: v64.4,15.79 65.16,16.55 v65.16,19.32 | v63.29,27.7 v63.29,34.83
PREVGL  (via drill 0.3)
  Top 0.15: v70.64,11.08 61.56,11.08 61.42,11.22 61.42,12.12 61.63,12.33 61.91,12.33 63.36,13.78 63.36,14.13 J1.23 | v75.62,16.07 75.62,19.39 74.93,20.08 EPD_C11.2 74.93,20.15 76.87,22.09 76.87,35.32 76.45,35.73 75.34,35.73 74.03,34.42 D4.2
  Bottom 0.15: v75.62,16.07 v70.64,11.08
RESE  (via drill 0.3)
  Top 0.15: v73.34,16.55 73.34,14.2 J1.3 | v56.58,28.95 56.58,28.74 55.95,28.12 R3.2 55.88,28.05 55.47,28.05 54.98,27.56 v54.78,27.56 | v53.74,26.52 53.74,16.07 52.15,14.47 52.15,13.57 Q3.2
  Bottom 0.15: v73.34,16.55 72.85,16.55 60.45,28.95 v56.58,28.95 | v54.78,27.56 v53.74,26.52
RESE'  (via drill 0.3)
  Top 0.15: SJ1.2 49.79,7.62 49.65,7.76 49.65,10.46 R2.2 49.72,10.46 54.08,10.46 57.96,14.34 57.96,15.58 58.17,15.79 v58.17,17.31 | v56.72,18.77 55.95,19.53 55.95,26.73 R3.1
  Bottom 0.15: v58.17,17.31 v56.72,18.77
RESET  (via drill 0.3)
  Top 0.15: R_RESET.1 20.64,106.78 20.64,106.99 22.23,108.59 RESET_BUTTON.4 25.76,108.59 RESET_BUTTON.3 25.83,108.59 26.8,108.59 26.87,108.65 v44.6,108.65 | v50.62,104.29 49.1,104.29 48.48,103.67 46.67,103.67 IC1.1 | v67.8,107.27 67.66,107.27 67.1,106.72 C5.1 | v10.73,60.11 10.53,59.9 10.53,47.09 U2.3
  Bottom 0.15: 52.22,104.29 64.82,104.29 v67.8,107.27 | 52.22,104.29 v50.62,104.29 50.76,104.22 50.76,95.22 24.65,69.11 14.96,69.11 10.73,64.89 v10.73,60.11 | v44.6,108.65 49.72,108.65 52.22,106.16 52.22,104.29
RTC_RST  (via drill 0.3)
  Top 0.15: v33.86,60.25 31.86,62.26 25.28,62.26 23.2,64.33 23.2,64.54 U2.16 | v77.49,60.25 79.71,60.25 79.84,60.39 84.35,60.39 85.25,59.49 85.25,59.21 U3.4
  Bottom 0.15: v77.49,60.25 v33.86,60.25
RX  (via drill 0.3)
  Top 0.15: v20.15,61.77 15.58,61.77 13.09,64.27 13.09,64.54 U2.24 | v34.07,54.36 v26.66,61.77 | v105.54,5.26 106.51,4.29 TP2.TP
  Bottom 0.15: v26.66,61.77 v20.15,61.77 | v34.07,54.36 56.44,54.36 v105.54,5.26
SCK  (via drill 0.3)
  Top 0.15: v12.4,44.39 14.27,46.26 14.27,47.02 U2.6 | v3.74,44.39 2.49,43.14 TP8.TP | v4.36,67.59 4.36,82.13 2.98,83.52 2.98,89.4 5.26,91.69 5.75,91.69 J4.P5 | 36.08,46.54 35.8,46.54 34.56,47.78 34.56,48.2 R6.1 | 36.08,46.54 41.97,52.42 41.97,54.99 42.66,55.68 U1.6 | v68.42,17.45 68.42,14.2 J1.13 | v52.42,16.55 52.42,16.76 38.85,30.33 38.85,32.41 38.71,32.55 v36.7,32.55 36.63,32.55 35.94,31.86 D10.2 | v36.7,45.84 36.08,46.47 36.08,46.54
  Bottom 0.15: v3.74,44.39 6.99,44.39 | 6.99,44.39 v12.4,44.39 12.4,45.64 13.23,46.47 14.75,46.47 32.89,28.32 33.79,28.32 36.7,31.23 v36.7,32.55 v36.7,45.84 | v4.36,67.59 6.99,64.96 6.99,44.39 | v68.42,17.45 68.42,18.56 65.58,21.4 57.76,21.4 52.91,16.55 v52.42,16.55
SCL  (via drill 0.3)
  Top 0.15: R2-PINH.1 159.9,3.67 160.73,3.67 161.28,3.12 165.65,3.12 166.06,3.53 166.06,8.31 163.71,10.67 SENSOR2.4 163.71,10.73 v163.71,17.17 | v139.54,52.7 139.54,57.83 139.33,58.03 138.99,58.03 U4.7 | v164.47,27.77 164.47,20.91 J3.4 | v18.97,65.72 18.14,64.89 18.14,64.61 U2.20 | v87.74,51.87 89.06,50.55 89.06,49.86 U3.16
  Bottom 0.15: v163.71,17.17 163.71,26.94 164.47,27.7 v164.47,27.77 v139.54,52.7 122.5,52.7 120.91,54.29 87.74,54.29 | v18.97,65.72 82.41,65.72 87.74,60.39 87.74,54.29 | v87.74,51.87 87.74,54.29
SDA  (via drill 0.3)
  Top 0.15: R1_PINH.1 165.16,3.74 165.16,3.95 165.78,4.57 165.78,7.48 162.88,10.39 162.88,10.67 SENSOR2.3 162.81,10.73 v162.81,16.55 | v146.46,51.45 142.69,55.23 | 142.69,55.23 139.4,58.52 138.99,58.52 U4.8 | v162.94,34.97 162.94,21.12 163.6,20.46 | 163.6,20.46 164.12,19.95 164.47,19.95 J3.3 | 163.6,20.46 v162.6,19.46 | v20.15,63.43 19.39,64.2 19.39,64.54 U2.19 | v87.74,51.25 87.74,49.93 87.81,49.86 U3.15 | v139.47,52.01 142.69,55.23
  Bottom 0.15: v162.94,34.97 v146.46,51.45 | v162.81,16.55 162.81,19.25 v162.6,19.46 | v20.15,63.43 75.55,63.43 v87.74,51.25 87.81,51.25 88.02,51.04 121.05,51.04 122.02,52.01 v139.47,52.01
SRC  (via drill 0.3)
  Top 0.15: v64.61,27.42 64.06,26.87 64.06,26.73 C4.2 | v51.8,16.69 51.45,16.34 51.45,15.65 Q3.3 | v61.22,25.9 61.22,26.25 62.19,27.22 62.19,31.02 64.34,33.18 v64.61,32.64 64.61,33.52 65.03,33.93 L1.1 65.09,34 66.83,35.73 66.83,36.43 D5.2
  Bottom 0.15: v64.61,32.64 v64.61,27.42 | v51.8,16.69 58.79,23.68 59,23.68 v61.22,25.9
SS_SD  (via drill 0.3)
  Top 0.15: v39.4,27.77 40.65,26.52 40.65,13.09 47.44,6.3 50.62,6.3 52.63,8.31 53.25,8.31 R10.1 | v35.25,48.89 35.94,49.58 D8.2 35.73,49.45 31.72,53.46 v28.81,53.46 | v16.41,49.03 13.43,49.03 11.77,47.37 11.77,47.09 U2.4 | v5.05,88.43 6.16,88.43 J4.P2
  Bottom 0.15: v39.4,27.77 39.4,44.74 v35.25,48.89 | v28.81,53.46 24.38,49.03 v16.41,49.03 16.41,49.1 10.25,55.26 10.25,64.82 12.05,66.62 12.05,97.23 11.7,97.57 11.43,97.57 5.05,91.2 v5.05,88.43
TX  (via drill 0.3)
  Top 0.15: v14.96,61.01 11.77,64.2 11.77,64.54 U2.25 | v16.41,59.56 18.28,59.56 v40.44,37.4 | v97.3,5.26 98.27,4.29 TP1.TP
  Bottom 0.15: v16.41,59.56 v14.96,61.01 | v40.44,37.4 65.16,37.4 v97.3,5.26
USB_D+  (via drill 0.3)
  Top 0.15: v137.46,53.19 139.68,50.97 150.2,50.97 D1.1 | v19.94,50.69 21.12,50.69 24.45,47.37 U2.14
  Bottom 0.15: v137.46,53.19 122.43,53.19 109.42,66.2 12.46,66.2 12.12,65.86 12.12,58.52 v19.94,50.69
USB_D-  (via drill 0.3)
  Top 0.15: v129.08,50 136.77,50 138.64,48.13 148.4,48.13 149.23,48.96 150.2,48.96 D1.3 | v20.98,50.21 20.98,49.52 23.13,47.37 23.13,47.09 U2.13
  Bottom 0.15: v129.08,50 88.36,50 75.21,63.16 33.24,63.16 20.98,50.9 v20.98,50.21
VBAT
  Top 0.3: 135.73,52.98 135.73,55.12 134.93,55.92 | 135.73,52.98 135.73,50.97 Q1.3 | 134.93,55.92 134,56.86 C2_BAT.1 | 134.93,55.92 136.56,57.55 136.84,57.55 U4.3 136.98,57.62 136.98,58.03 U4.2 136.84,58.1 136.56,58.1 136.28,58.38 136.28,58.79 142.72,65.23 149.09,65.23 TP3.TP | 135.73,52.98 128.6,52.98 MCP73831.3
VBUS
  Top 0.3: C4_USB.1 152.97,45.08 152.97,42.59 152.63,42.24 PFMF.050.1.2 152.49,42.11 150.97,42.11 148.96,40.1 147.23,40.1 147.02,40.3 147.02,44.11 | 151.87,48.55 152.7,47.72 152.7,47.23 C5_USB.1 | 151.87,48.55 151.87,49.45 152.35,49.93 152.7,49.93 D1.5 152.28,50.07 151.87,50.48 151.87,50.62 149.09,53.39 149.09,61.15 TP14.TP | 147.02,44.11 151.38,48.48 151.73,48.48 151.87,48.55 | R1_PWRUSB.2 118,37.74 120.22,37.74 120.43,37.53 D2.2 120.29,37.88 120.29,51.94 120.98,52.63 121.05,52.77 | 121.05,52.77 120.43,53.39 118.56,53.39 C1_BAT.1 | 121.05,52.77 122.43,52.77 122.99,53.32 CHG_LED.A 123.13,53.39 125.55,53.39 125.97,52.98 MCP73831.4 126.03,52.84 126.03,52.28 129.43,48.89 134.76,48.89 Q1.1 134.9,48.75 139.47,44.18 146.88,44.18 147.02,44.11
VRTC
  Top 0.3: 93.63,49.72 94.8,49.72 95.08,49.45 C11.1 | 93.63,49.72 92.52,49.72 C8.1 92.38,49.65 91.2,48.48 87.46,48.48 86.56,49.38 86.56,49.79 U3.14 | 93.63,49.72 93.63,60.53 R_CAPACITOR.2
VUSB
  Top 0.3: J2.A9 163.71,56.79 163.71,56.58 J2.B4 163.84,56.51 164.33,56.51 164.54,56.3 164.54,52.22 164.4,52.08 163.84,52.08 J2.B9 163.71,52.01 163.71,51.73 J2.A4 163.57,51.66 158.38,51.66 152.56,45.84 151.17,45.84 148.13,42.8 148.13,42.24 PFMF.050.1.1